# Altium PCB ESCV3.PcbDoc
Units mm, origin at the board's own origin, x right, y up, seen from the top; angles counter-clockwise.
Board outline 58 x 34.5 mm, 2 copper layers (Top Layer, Bottom Layer); 54 components, 55 nets, 183 pads, 95 vias.
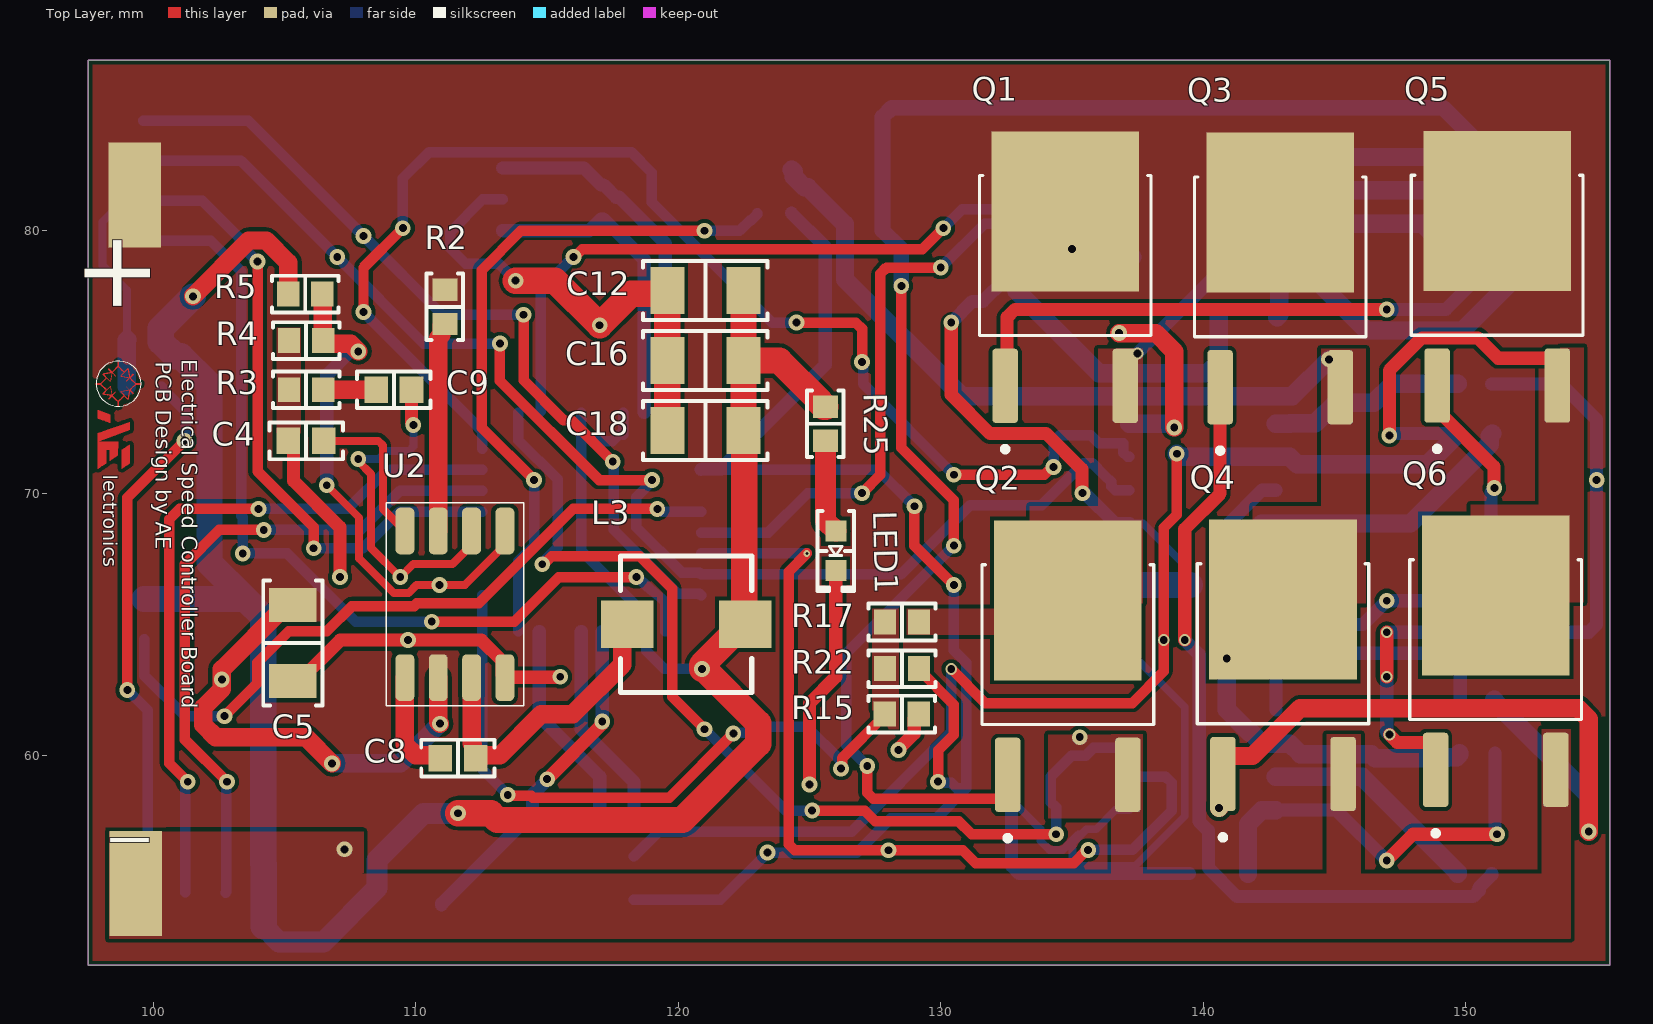
[diagram p0: Top Layer view]
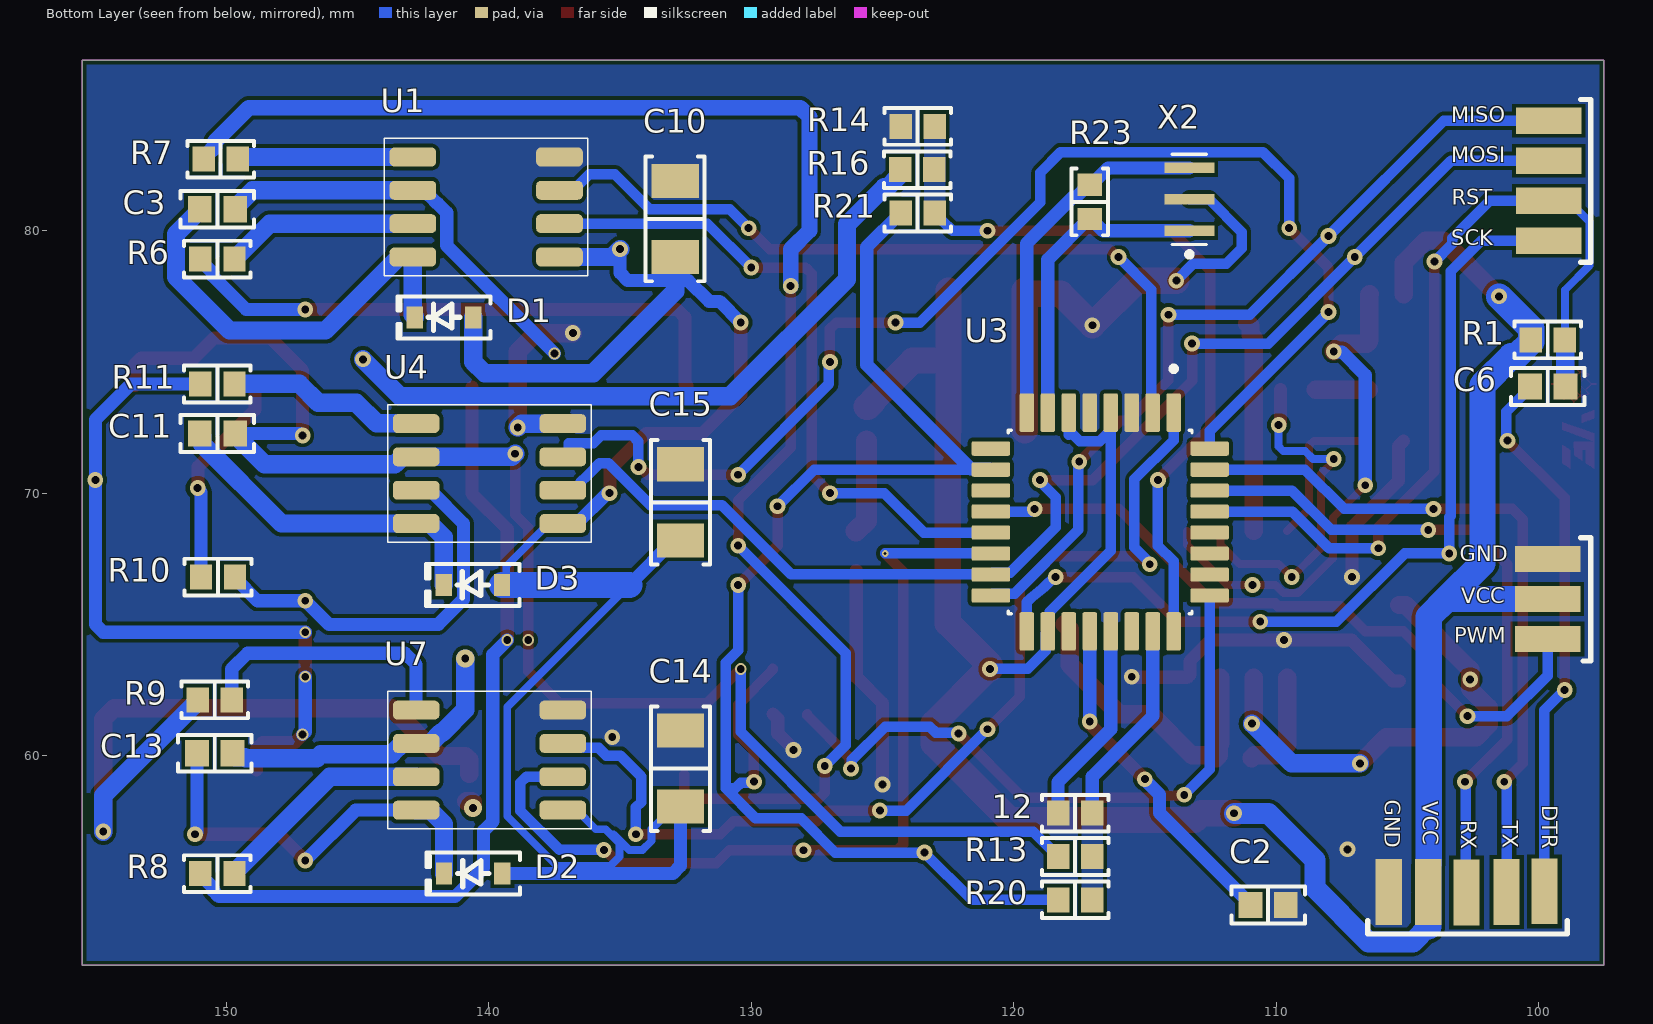
[diagram p1: Bottom Layer view, seen from below]
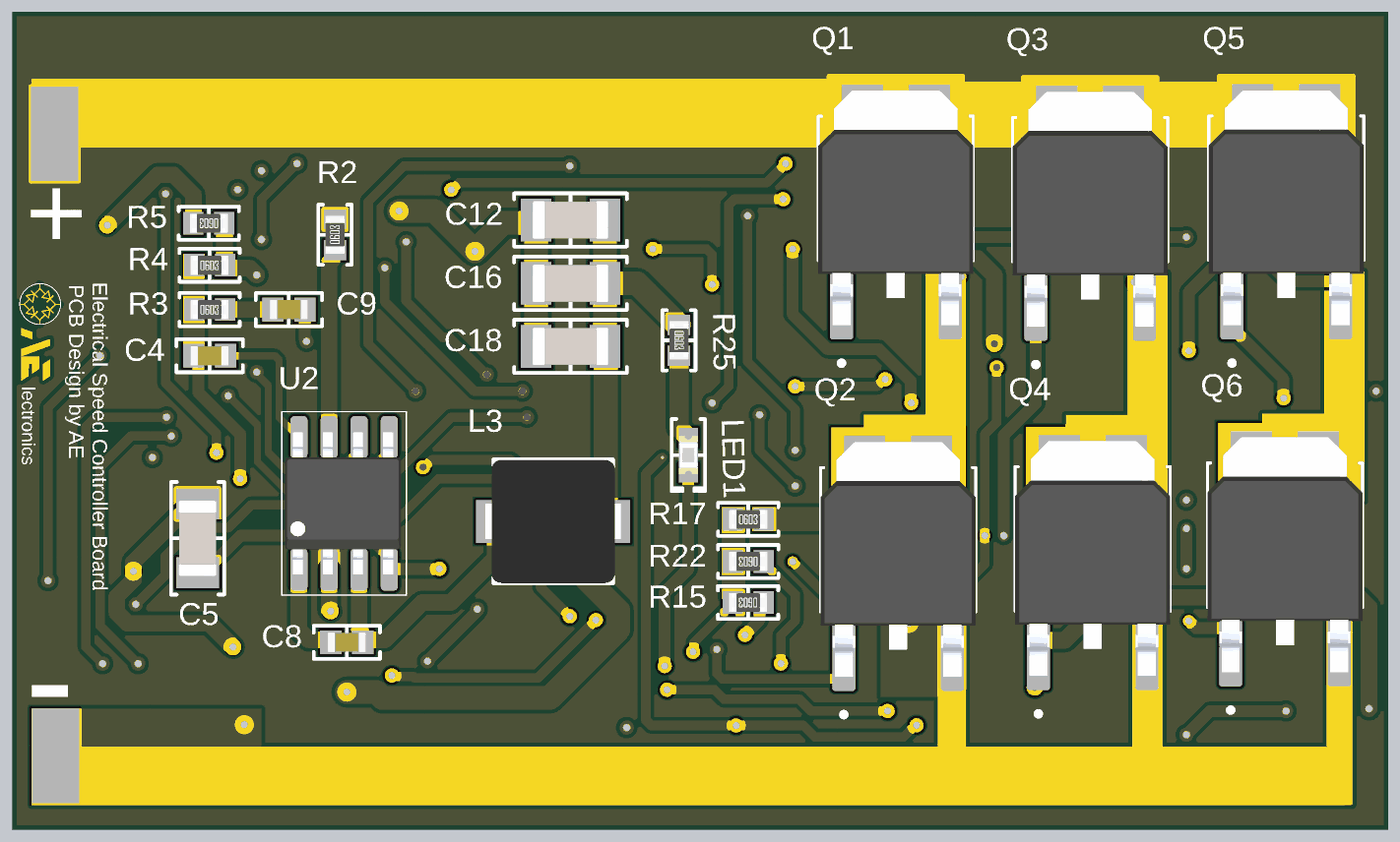
[diagram p2: 3D render of the assembled board from above, using the file's embedded part models]
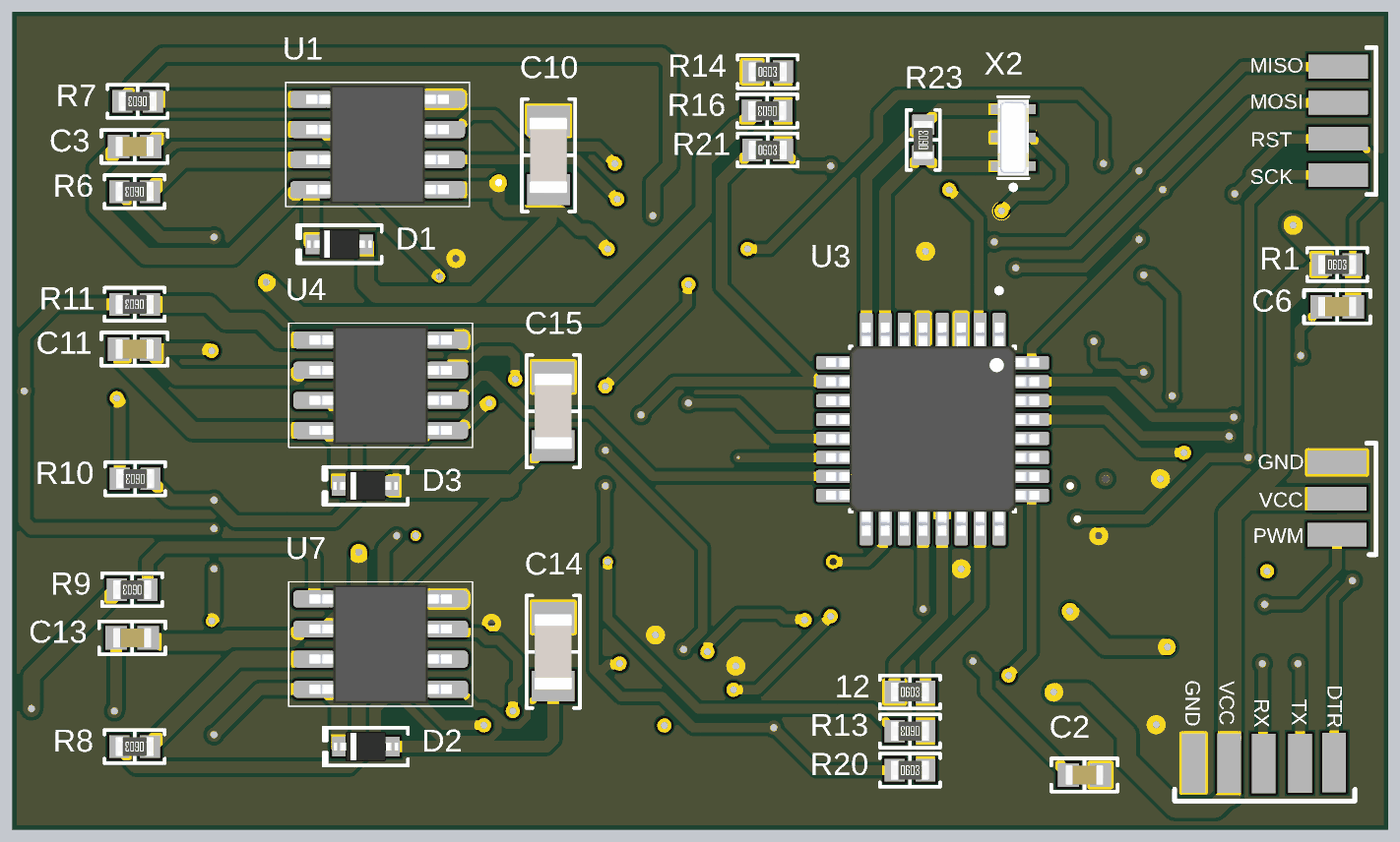
[diagram p3: 3D render of the assembled board from below, using the file's embedded part models]

## Layer stack, top to bottom
Top Solder: solder mask 0.0102, Solder Resist, Dk 3.5
Top Layer: signal copper 0.0356
Dielectric 1: dielectric 0.32, FR-4, Dk 4.8
Bottom Layer: signal copper 0.0356
Bottom Solder: solder mask 0.0102, Solder Resist, Dk 3.5

## Board outline
97.5,52 97.5,86.5 155.5,86.5 155.5,52

## Design rules (kind name [scope] priority, off if disabled: settings)
Clearance [All] p1: gap=0.152 ignorepadtopadclearanceinfootprint=FALSE
HoleSize [All] p1: absolutevalues=TRUE maxlimit=1 minlimit=0.025 maxpercent=80.000 minpercent=20.000
PolygonConnect [All] p1: connectstyle=Direct reliefconductorwidth=0.254 reliefentries=4 polygonreliefangle="90 Angle" airgapwidth=0.254
RoutingVias [All] p1: holewidth=0.711 width=1.27 viastyle="Through Hole" minholewidth=0.711 minwidth=1.27 maxholewidth=0.711 maxwidth=1.27
SolderMaskExpansion [All] p1: expansion=0.102 istentingtop=FALSE
Width [All] p1: maxlimit=2 minlimit=0.152 preferedwidth=0.5
29 further rules are at their usual default settings.

## Components (designator, comment, footprint, x,y, rotation, side; value= is the part's Value field where it differs from the comment)
12 "10 kOhms" "RES 0603_1608" 117.654,57.803 r180 bottom
C2 "100 nF" "CAP 0603_1608" 110.3,54.3 r180 bottom
C3 "2.2 uF" "CAP 0603_1608" 150.35,80.824 r180 bottom
C4 "100 nF" "CAP 0603_1608" 105.813,71.993 r0 top
C5 "10 µF" "CAP 1206_3216 - 0.8MM" 105.305,64.289 r90 top
C6 "100 nF" "CAP 0603_1608" 99.643,74.063 r0 bottom
C8 "10 nF" "CAP 0603_1608" 111.6,59.9 r0 top value="10 nF"
C9 "3.9 nF" "CAP 0603_1608" 109.156,73.941 r0 top
C10 "10 µF" "CAP 1206_3216 - 0.8MM" 132.9,80.452 r270 bottom
C11 "2.2 uF" "CAP 0603_1608" 150.35,72.274 r180 bottom
C12 "22 µF" "CAP 1206_3216 - 0.8MM" 121.031,77.724 r0 top
C13 "2.2 uF" "CAP 0603_1608" 150.45,60.089 r180 bottom
C14 "10 µF" "CAP 1206_3216 - 0.8MM" 132.7,59.5 r270 bottom
C15 "10 µF" "CAP 1206_3216 - 0.8MM" 132.7,69.65 r270 bottom
C16 "22 µF" "CAP 1206_3216 - 0.8MM" 121.031,75.051 r0 top
C18 "22 µF" "CAP 1206_3216 - 0.8MM" 121.031,72.39 r0 top
D1 "1N4148WS-7-F" SOD323 141.713,76.7 r0 bottom
D2 "1N4148WS-7-F" SOD323 140.6,55.5 r0 bottom
D3 "1N4148WS-7-F" SOD323 140.613,66.5 r0 bottom
L3 "10 µH" "BOURNS SRP5030T" 120.3,65 r180 top
LED1 "Green" "LED 0603_1608 GREEN" 126,67.8 r270 top
Q1 "IRLR7843TRPBF" TO229P990X239-3_4N 134.747,78.232 r90 top
Q2 "IRLR7843TRPBF" TO229P990X239-3_4N 134.844,63.404 r90 top
Q3 "IRLR7843TRPBF" TO229P990X239-3_4N 142.94,78.178 r90 top
Q4 "IRLR7843TRPBF" TO229P990X239-3_4N 143.046,63.436 r90 top
Q5 "IRLR7843TRPBF" TO229P990X239-3_4N 151.21,78.24 r90 top
Q6 "IRLR7843TRPBF" TO229P990X239-3_4N 151.153,63.594 r90 top
R1 "10 kOhms" "RES 0603_1608" 99.643,75.841 r180 bottom
R2 "100 kOhms" "RES 0603_1608" 111.1,77.1 r90 top
R3 "6.81 kOhms" "RES 0603_1608" 105.813,73.941 r0 top
R4 "10 kOhms" "RES 0603_1608" 105.813,75.813 r0 top
R5 "44.2 kOhms" "RES 0603_1608" 105.779,77.586 r180 top
R6 "100 Ohms" "RES 0603_1608" 150.35,78.919 r0 bottom
R7 "100 Ohms" "RES 0603_1608" 150.223,82.729 r0 bottom
R8 "100 Ohms" "RES 0603_1608" 150.35,55.5 r0 bottom
R9 "100 Ohms" "RES 0603_1608" 150.45,62.121 r0 bottom
R10 "100 Ohms" "RES 0603_1608" 150.325,66.8 r0 bottom
R11 "100 Ohms" "RES 0603_1608" 150.35,74.163 r0 bottom
R13 "33 kOhms" "RES 0603_1608" 117.654,56.152 r0 bottom
R14 "10 kOhms" "RES 0603_1608" 123.658,83.979 r180 bottom
R15 "10 kOhms" "RES 0603_1608" 128.518,61.578 r180 top
R16 "33 kOhms" "RES 0603_1608" 123.673,82.328 r0 bottom
R17 "33 kOhms" "RES 0603_1608" 128.524,65.089 r0 top
R20 "33 kOhms" "RES 0603_1608" 117.654,54.501 r180 bottom
R21 "33 kOhms" "RES 0603_1608" 123.658,80.677 r180 bottom
R22 "33 kOhms" "RES 0603_1608" 128.524,63.311 r180 top
R23 "10 kOhms" "RES 0603_1608" 117.1,81.1 r90 bottom
R25 "100 Ohms" "RES 0603_1608" 125.603,72.644 r270 top
U1 "IR2101STRPBF" IR2101STRPBF 140.105,81.034 r0 bottom
U2 "MP2307DN-LF-Z" MP2307DN-LF-Z 112.036,65.813 r90 top
U3 "ATMEGA328P-AU" QFP80P900X900X120-32N 116.7,68.9 r270 bottom
U4 "IR2101STRPBF" IR2101STRPBF 139.978,70.874 r0 bottom
U7 "IR2101STRPBF" IR2101STRPBF 139.978,59.952 r0 bottom
X2 "CSTCE16M0V53Z-R0" OSC_CSTCE16M0V53Z-R0 113.3,81.2 r90 bottom

## Footprints (in the part's own frame and the unit in brackets; to place one, negate y for a bottom-side part, rotate by r counter-clockwise, add the part's x,y. Pads: shape width x height; smd on the part's side, far side on the other; paste and mask are expansions set on the pad)
"BOURNS SRP5030T" [mm] "Precision Wire Wound Inductor, 2-Leads, Body 5.70x5.20mm, IPC Medium Density"
  rect 2x1.8 smd: 1(-2.25,0) 2(2.25,0)
  silkscreen extent -2.5,-2.6 2.5,2.6, body extent -2.85,-2.6 2.85,2.6, height 3
"CAP 0603_1608" [mm] "Chip Capacitor, 2-Leads, Body 1.60x0.80mm, IPC Medium Density"
  rect 0.9x1 smd: 1(-0.675,0) 2(0.675,0)
  silkscreen extent -1.4,-0.7 1.4,0.7, body extent -0.8,-0.41 0.8,0.41, height 0.82
"CAP 1206_3216 - 0.8MM" [mm] "Chip Capacitor, 2-Leads, Body 3.25x1.60mm, IPC Medium Density"
  rect 1.3x1.8 smd: 1(-1.45,0) 2(1.45,0)
  silkscreen extent -2.37,-1.13 2.37,1.13, body extent -1.6,-0.8 1.6,0.8, height 0.8
IR2101STRPBF [mm]
  rrect50% 1.78x0.72 smd: 1(-2.794,2.032) 2(-2.794,0.762) 3(-2.794,-0.508) 4(-2.794,-1.778) 5(2.794,-1.778) 6(2.794,-0.508) 7(2.794,0.762) 8(2.794,2.032)
  silkscreen extent -3.88,-2.5 3.87,2.75, body extent -3,-2.37 3,2.63, height 1.75
"LED 0603_1608 GREEN" [mm] "Chip Diode, 2-Leads, Body 1.60x0.80mm, IPC Medium Density"
  rect 0.8x0.8 smd: 1(-0.75,0) 2(0.75,0)
  silkscreen extent -1.52,-0.7 1.52,0.7, body extent -0.8,-0.4 0.8,0.4, height 0.53
MP2307DN-LF-Z [mm]
  rrect50% 1.78x0.72 smd: 1(-2.844,2.457) 2(-2.844,1.187) 3(-2.844,-0.083) 4(-2.844,-1.353) 5(2.744,-1.353) 6(2.744,-0.083) 7(2.744,1.187) 8(2.744,2.457)
  silkscreen extent -3.92,-2.08 3.83,3.18, body extent -3.05,-1.85 2.95,3.05, height 1.7
OSC_CSTCE16M0V53Z-R0 [mm]
  rect 0.4x1.9 smd: 1(-1.2,0) 2(0,0) 3(1.2,0)
  silkscreen extent -2.2,-0.65 1.72,0.65, body extent -1.6,-0.65 1.6,0.65, height 1
QFP80P900X900X120-32N [mm]
  rrect25% 1.47x0.55 smd: 1(-4.17,2.8) 2(-4.17,2) 3(-4.17,1.2) 4(-4.17,0.4) 5(-4.17,-0.4) 6(-4.17,-1.2) 7(-4.17,-2) 8(-4.17,-2.8) 17(4.17,-2.8) 18(4.17,-2) 19(4.17,-1.2) 20(4.17,-0.4) 21(4.17,0.4) 22(4.17,1.2) 23(4.17,2) 24(4.17,2.8)
  rrect25% 0.55x1.47 smd: 9(-2.8,-4.17) 10(-2,-4.17) 11(-1.2,-4.17) 12(-0.4,-4.17) 13(0.4,-4.17) 14(1.2,-4.17) 15(2,-4.17) 16(2.8,-4.17) 25(2.8,4.17) 26(2,4.17) 27(1.2,4.17) 28(0.4,4.17) 29(-0.4,4.17) 30(-1.2,4.17) 31(-2,4.17) 32(-2.8,4.17)
  silkscreen extent -5.94,-3.5 3.5,3.5, body extent -4.5,-4.5 4.5,4.5, height 1.2
"RES 0603_1608" [mm] "Chip Resistor, 2-Leads, Body 1.60x0.80mm, IPC Medium Density"
  rect 0.85x0.95 smd: 1(-0.65,0) 2(0.65,0)
  silkscreen extent -1.27,-0.7 1.27,0.7, body extent -0.8,-0.4 0.8,0.4, height 0.45
SOD323 [mm] "SOD, 2-Leads, Body 1.25x2.50mm, IPC Medium Density"
  rect 0.625x0.83 smd: 1(-1.113,0) 2(1.112,0)
  silkscreen extent -1.78,-0.8 1.78,0.8, body extent -1.36,-0.63 1.36,0.62, height 1.05
TO229P990X239-3_4N [mm]
  rrect25% 2.83x0.97 smd: 1(-4.14,2.29) 3(-4.14,-2.29)
  rect 6.1x5.63 smd paste-4: 4(2.51,0)
  silkscreen extent -6.65,-3.27 3.87,3.27, body extent -4.95,-3.27 4.95,3.27, height 2.39

## Part data
12 R1 R4 R14 R15 R23: library part RNCS0603BKE10K0, "RES 10K OHM 0.1% 1/16W 0603", Device Package="0603 (1608 Metric)", manufacturer="Stackpole Electronics Inc", Operating Temperature="-55°C ~ 155°C", Power (Watts)="0.063W, 1/16W", Ratings=AEC-Q200, Supplier Device Package=0603, Supplier Part Number 1=RNCS0603BKE10K0CT-ND, Temperature Coefficient=±25ppm/°C, Tolerance=±0.1%, componentlink1description=Datasheet, componentlink1url=https://www.seielect.com/catalog/sei-rncs_rnch.pdf, componentlink2description="DigiKey Link", componentlink2url=https://www.digikey.com/en/products/detail/stackpole-electronics-inc/RNCS0603BKE10K0/1708836, Composition="Thin Film", Features="Anti-Corrosive, Automotive AEC-Q200, Moisture Resistant", Height - Seated (Max)="0.022\" (0.55mm)", lastupdated="9.02.2024 20:43:37", Lifecycle Status=Active, Minimum Order=1, Number of Terminations=2, Package / Case="0603 (1608 Metric)", packaging=TapeAndReel, Part Number=RNCS0603BKE10K0, Part Status=Active, partid=4838, Price=0.06, Resistance="10 kOhms", series=RNCS, Size / Dimension="0.061\" L x 0.031\" W (1.55mm x 0.80mm)", Supplier 1=DigiKey
C2 C3 C4 C6 C8 C9 C11 C13: library part CBR06C399BAGAC, "CAP CER 3.9PF 250V C0G/NP0 0603", Capacitance="3.9 pF", Device Package="0603 (1608 Metric)", manufacturer=KEMET, Operating Temperature="-55°C ~ 125°C", Supplier Part Number 1=399-8807-1-ND, Temperature Coefficient="C0G, NP0", Tolerance=±0.1pF, Voltage - Rated=250V, Applications="RF, Microwave, High Frequency", componentlink1description=Datasheet, componentlink1url=https://api.kemet.com/component-edge/download/datasheet/CBR06C399BAGAC.pdf, componentlink2description="DigiKey Link", componentlink2url=https://www.digikey.com/en/products/detail/kemet/CBR06C399BAGAC/3479707, Features="High Q, Low Loss, Ultra Low ESR", lastupdated="9.02.2024 20:10:06", Lifecycle Status=Active, Minimum Order=1, Mounting Type="Surface Mount, MLCC", Package / Case="0603 (1608 Metric)", packaging=TapeAndReel, Part Number=CBR06C399BAGAC, Part Status=Active, partid=18061, Price=0.12, series="CBR-SMD RF C0G", Size / Dimension="0.063\" L x 0.031\" W (1.60mm x 0.80mm)", Supplier 1=DigiKey, Thickness (Max)="0.035\" (0.90mm)"
C5 C10 C14 C15: library part EMK316BJ106MD-T, "CAP CER 10UF 16V X5R 1206", Device Package="1206 (3216 Metric)", manufacturer="Taiyo Yuden", Operating Temperature="-55°C ~ 85°C", Supplier Part Number 1=587-4881-1-ND, Temperature Coefficient=X5R, Tolerance=±20%, Voltage - Rated=16V, Applications="SMPS Filtering", Capacitance="10 µF", componentlink1description=Datasheet, componentlink1url=http://www.yuden.co.jp/productdata/catalog/mlcc06_e.pdf, componentlink2description="DigiKey Link", componentlink2url=https://www.digikey.com/en/products/detail/taiyo-yuden/EMK316BJ106MD-T/6563474, lastupdated="4.06.2024 19:10:41", Lifecycle Status=Active, Minimum Order=1, Mounting Type="Surface Mount, MLCC", Package / Case="1206 (3216 Metric)", packaging=TapeAndReel, Part Number=EMK316BJ106MD-T, Part Status=Active, partid=18996, Price=0.04, series=M, Size / Dimension="0.126\" L x 0.063\" W (3.20mm x 1.60mm)", Supplier 1=DigiKey, Thickness (Max)="0.037\" (0.95mm)"
C12 C16 C18: library part CL31A226MOCLNNC, "CAP CER 22UF 16V X5R 1206", Device Package="1206 (3216 Metric)", manufacturer="Samsung Electro-Mechanics", Operating Temperature="-55°C ~ 85°C", Supplier Part Number 1=1276-2728-1-ND, Temperature Coefficient=X5R, Tolerance=±20%, Voltage - Rated=16V, Applications="General Purpose", Capacitance="22 µF", componentlink1description=Datasheet, componentlink1url=http://www.samsungsem.com/kr/support/product-search/mlcc/CL31A226MOCLNNC.jsp, componentlink2description="DigiKey Link", componentlink2url=https://www.digikey.com/en/products/detail/samsung-electro-mechanics/CL31A226MOCLNNC/3888386, Features="Low Profile", lastupdated="4.06.2024 19:10:40", Lifecycle Status=Active, Minimum Order=1, Mounting Type="Surface Mount, MLCC", Package / Case="1206 (3216 Metric)", packaging=TapeAndReel, Part Number=CL31A226MOCLNNC, Part Status=Active, partid=19106, Price=0.04, series=CL, Size / Dimension="0.126\" L x 0.063\" W (3.20mm x 1.60mm)", Supplier 1=DigiKey, Thickness (Max)="0.037\" (0.95mm)"
D1 D2 D3: "DIODE GEN PURP 75V 150MA SOD323", Capacitance @ Vr, F="2pF @ 0V, 1MHz", Current - Average Rectified (Io)=150mA, Current - Reverse Leakage @ Vr="1 µA @ 75 V", manufacturer="Diodes Incorporated", Operating Temperature - Junction="-65°C ~ 150°C", Package / Case="SC-76, SOD-323", Supplier Device Package=SOD-323, Supplier Part Number 1=1N4148WS-FDICT-ND, Voltage - DC Reverse (Vr) (Max)="75 V", Voltage - Forward (Vf) (Max) @ If="1.25 V @ 150 mA", componentlink1description=Datasheet, componentlink1url=https://www.diodes.com/assets/Datasheets/ds30097.pdf, componentlink2description="DigiKey Link", componentlink2url=https://www.digikey.com/en/products/detail/diodes-incorporated/1N4148WS-7-F/815127, Diode Type=Standard, lastupdated="3.06.2024 20:20:13", Lifecycle Status=Active, Minimum Order=1, Mounting Type="Surface Mount", packaging=TapeAndReel, Part Number=1N4148WS-7-F, Part Status=Active, partid=3076, Price=0.02, Reverse Recovery Time (trr)="4 ns", series=-, Speed="Small Signal =< 200mA (Io), Any Speed", Supplier 1=DigiKey
L3: library part SRP5030T-100M, "FIXED IND 10UH 2.75A 128MOHM SMD", Current - Saturation=3.5A, Current Rating (Amps)="2.75 A", DC Resistance (DCR)="128mOhm Max", Device Package=Nonstandard, manufacturer="Bourns Inc.", Operating Temperature="-40°C ~ 125°C", Supplier Part Number 1=SRP5030T-100MCT-ND, Tolerance=±20%, Inductance Frequency - Test="100 kHz", componentlink1description=Datasheet, componentlink1url=https://www.bourns.com/docs/Product-Datasheets/SRP5030T.pdf, componentlink2description="DigiKey Link", componentlink2url=https://www.digikey.com/en/products/detail/bourns-inc/SRP5030T-100M/3986087, Height - Seated (Max)="0.118\" (3.00mm)", lastupdated="3.06.2024 20:02:35", Lifecycle Status=Active, Material - Core="Iron Powder", Minimum Order=1, Mounting Type="Surface Mount", Package / Case=Nonstandard, packaging=TapeAndReel, Part Number=SRP5030T-100M, Part Status=Active, partid=9, Price=0.59, series=SRP5030T, Shielding=Shielded, Size / Dimension="0.224\" L x 0.205\" W (5.70mm x 5.20mm)", Supplier 1=DigiKey, Type="Drum Core, Wirewound", Inductance="10 µH"
LED1: library part LSM0603453V, "LED GREEN CLEAR CHIP 0603 SMD", Current - Test=20mA, Device Package="0603 (1608 Metric)", Lens Color=Colorless, manufacturer="Visual Communications Company - VCC", Millicandela Rating=63mcd, Supplier Device Package="Chip LED", Supplier Part Number 1=LSM0603453VCT-ND, Voltage - Forward (Vf) (Typ)=2V, Color=Green, componentlink1description=Datasheet, componentlink1url=https://vcclite.com/wp-content/uploads/wpallimport/files/files/LSM0603453V.pdf, componentlink2description="DigiKey Link", componentlink2url=https://www.digikey.com/en/products/detail/visual-communications-company-vcc/LSM0603453V/9486724, Configuration=Standard, Height (Max)=0.65mm, lastupdated="3.06.2024 19:58:54", Lens Size="1.20mm x 0.80mm", Lens Style="Rectangle with Flat Top", Lens Transparency=Clear, Lifecycle Status=Active, Minimum Order=1, Mounting Type="Surface Mount", Package / Case="0603 (1608 Metric)", packaging=TapeAndReel, Part Number=LSM0603453V, Part Status=Active, partid=579, Price=0.09, series=LSM0603, Size / Dimension="1.60mm L x 0.80mm W", Supplier 1=DigiKey, Viewing Angle=120°, Wavelength - Dominant=572nm, Wavelength - Peak=571nm
Q1 Q2 Q3 Q4 Q5 Q6: "RoHS Compliant", Package="TO-252-3 Infineon", Availability="In Stock", Check_prices=https://www.snapeda.com/parts/IRLR7843TRPBF/Infineon+Technologies/view-part/?ref=eda, MF="Infineon Technologies", MP=IRLR7843TRPBF, Price=None, Purchase-URL=https://pricing.snapeda.com/search/part/IRLR7843TRPBF/?ref=eda, SnapEDA_Link=https://www.snapeda.com/parts/IRLR7843TRPBF/Infineon+Technologies/view-part/?ref=snap
R2: library part RNCS0603BKE100K, "RES 100K OHM 0.1% 1/16W 0603", Device Package="0603 (1608 Metric)", manufacturer="Stackpole Electronics Inc", Operating Temperature="-55°C ~ 155°C", Power (Watts)="0.063W, 1/16W", Ratings=AEC-Q200, Supplier Device Package=0603, Supplier Part Number 1=RNCS0603BKE100KCT-ND, Temperature Coefficient=±25ppm/°C, Tolerance=±0.1%, componentlink1description=Datasheet, componentlink1url=https://www.seielect.com/catalog/sei-rncs_rnch.pdf, componentlink2description="DigiKey Link", componentlink2url=https://www.digikey.com/en/products/detail/stackpole-electronics-inc/RNCS0603BKE100K/1708835, Composition="Thin Film", Features="Anti-Corrosive, Automotive AEC-Q200, Moisture Resistant", Height - Seated (Max)="0.022\" (0.55mm)", lastupdated="9.02.2024 20:43:37", Lifecycle Status=Active, Minimum Order=1, Number of Terminations=2, Package / Case="0603 (1608 Metric)", packaging=TapeAndReel, Part Number=RNCS0603BKE100K, Part Status=Active, partid=4849, Price=0.06, Resistance="100 kOhms", series=RNCS, Size / Dimension="0.061\" L x 0.031\" W (1.55mm x 0.80mm)", Supplier 1=DigiKey
R3: library part RQ73C1J6K81BTDF, "RQ 0603 6K81 0.1% 10PPM 1K RL", Device Package="0603 (1608 Metric)", manufacturer="TE Connectivity Passive Product", Operating Temperature="-55°C ~ 155°C", Power (Watts)=0.15W, Ratings=AEC-Q200, Supplier Device Package=0603, Supplier Part Number 1=1712-RQ73C1J6K81BTDFCT-ND, Temperature Coefficient=±10ppm/°C, Tolerance=±0.1%, componentlink1description=Datasheet, componentlink1url=https://www.te.com/commerce/DocumentDelivery/DDEController?Action=srchrtrv&DocNm=1773270-2&DocType=DS&DocLang=English, componentlink2description="DigiKey Link", componentlink2url=https://www.digikey.com/en/products/detail/te-connectivity-passive-product/RQ73C1J6K81BTDF/13965021, Composition="Thin Film", Features="Anti-Sulfur, Automotive AEC-Q200, Moisture Resistant", Height - Seated (Max)="0.022\" (0.55mm)", lastupdated="9.02.2024 20:41:31", Lifecycle Status=Active, Minimum Order=1, Number of Terminations=2, Package / Case="0603 (1608 Metric)", packaging=TapeAndReel, Part Number=RQ73C1J6K81BTDF, Part Status=Active, partid=63038, Price=0.38, Resistance="6.81 kOhms", series=RQ73, Size / Dimension="0.061\" L x 0.031\" W (1.55mm x 0.80mm)", Supplier 1=DigiKey
R5: library part ERJ-PB3B4422V, "RES SMD 44.2K OHM 0.1% 1/5W 0603", Device Package="0603 (1608 Metric)", manufacturer="Panasonic Electronic Components", Operating Temperature="-55°C ~ 155°C", Power (Watts)="0.2W, 1/5W", Ratings=AEC-Q200, Supplier Device Package=0603, Supplier Part Number 1=P20159CT-ND, Temperature Coefficient=±50ppm/°C, Tolerance=±0.1%, componentlink1description=Datasheet, componentlink1url=https://industrial.panasonic.com/cdbs/www-data/pdf/RDM0000/AOA0000C328.pdf, componentlink2description="DigiKey Link", componentlink2url=https://www.digikey.com/en/products/detail/panasonic-electronic-components/ERJ-PB3B4422V/6212942, Composition="Thick Film", Features="Automotive AEC-Q200, Pulse Withstanding", Height - Seated (Max)="0.022\" (0.55mm)", lastupdated="9.02.2024 20:43:36", Lifecycle Status=Active, Minimum Order=1, Number of Terminations=2, Package / Case="0603 (1608 Metric)", packaging=TapeAndReel, Part Number=ERJ-PB3B4422V, Part Status=Active, partid=4939, Price=0.02, Resistance="44.2 kOhms", series=ERJ-PB3, Size / Dimension="0.063\" L x 0.031\" W (1.60mm x 0.80mm)", Supplier 1=DigiKey
R6 R7 R8 R9 R10 R11 R25: library part RNCS0603BKE100R, "RES 100 OHM 0.1% 1/16W 0603", Device Package="0603 (1608 Metric)", manufacturer="Stackpole Electronics Inc", Operating Temperature="-55°C ~ 155°C", Power (Watts)="0.063W, 1/16W", Ratings=AEC-Q200, Supplier Device Package=0603, Supplier Part Number 1=RNCS0603BKE100RCT-ND, Temperature Coefficient=±25ppm/°C, Tolerance=±0.1%, componentlink1description=Datasheet, componentlink1url=https://www.seielect.com/catalog/sei-rncs_rnch.pdf, componentlink2description="DigiKey Link", componentlink2url=https://www.digikey.com/en/products/detail/stackpole-electronics-inc/RNCS0603BKE100R/1799988, Composition="Thin Film", Features="Anti-Corrosive, Automotive AEC-Q200, Moisture Resistant", Height - Seated (Max)="0.022\" (0.55mm)", lastupdated="9.02.2024 20:43:37", Lifecycle Status=Active, Minimum Order=1, Number of Terminations=2, Package / Case="0603 (1608 Metric)", packaging=TapeAndReel, Part Number=RNCS0603BKE100R, Part Status=Active, partid=4839, Price=0.06, Resistance="100 Ohms", series=RNCS, Size / Dimension="0.061\" L x 0.031\" W (1.55mm x 0.80mm)", Supplier 1=DigiKey
R13 R16 R17 R20 R21 R22: library part CPF0603B33KE1, "RES SMD 33K OHM 0.1% 1/16W 0603", Device Package="0603 (1608 Metric)", manufacturer="TE Connectivity Passive Product", Operating Temperature="-55°C ~ 155°C", Power (Watts)="0.063W, 1/16W", Supplier Device Package=0603, Supplier Part Number 1=A103086CT-ND, Temperature Coefficient=±25ppm/°C, Tolerance=±0.1%, componentlink1description=Datasheet, componentlink1url=https://www.te.com/commerce/DocumentDelivery/DDEController?Action=srchrtrv&DocNm=1773200&DocType=DS&DocLang=English, componentlink2description="DigiKey Link", componentlink2url=https://www.digikey.com/en/products/detail/te-connectivity-passive-product/CPF0603B33KE1/2381952, Composition="Thin Film", Height - Seated (Max)="0.022\" (0.55mm)", lastupdated="9.02.2024 20:43:33", Lifecycle Status=Active, Minimum Order=1, Number of Terminations=2, Package / Case="0603 (1608 Metric)", packaging=TapeAndReel, Part Number=CPF0603B33KE1, Part Status=Active, partid=5785, Price=0.12, Resistance="33 kOhms", series="CPF, Neohm", Size / Dimension="0.061\" L x 0.031\" W (1.55mm x 0.80mm)", Supplier 1=DigiKey
U3: "AVR AVRÂ® ATmega Microcontroller IC 8-Bit 20MHz 32KB (16K x 16) FLASH 32-TQFP (7x7)", Package="TQFP-32 Microchip", Check_prices=https://www.snapeda.com/parts/ATMEGA328P-AU/Microchip/view-part/?ref=eda, MF="Microchip Technology", MP=ATMEGA328P-AU, SnapEDA_Link=https://www.snapeda.com/parts/ATMEGA328P-AU/Microchip/view-part/?ref=snap
X2: "20MHz Ceramic Resonator Built in Capacitor 15pF +/- 0.2% -40C - 125C Surface Mount", Package=None, Availability=Unavailable, MF=Murata, MP=CSTCE16M0V53Z-R0, Price=None

## Free pads (board coordinates)
  rect 2x4 smd: 1(99.28,81.361) 2(99.314,55.118)
  rect 2.5x1 smd far side: 1(99.605,84.193) 1(99.651,67.488) 2(99.605,82.669) 2(99.651,65.964) 3(99.605,81.145) 3(99.651,64.44) 4(99.605,79.621)
  rect 1x2.5 smd far side: 1(105.7,54.8) 2(104.2,54.8) 3(102.743,54.779) 4(101.211,54.798) 5(99.77,54.825)

## Via types
v1: diameter 0.6, hole 0.3, Top Layer to Bottom Layer, tented both sides, 43 vias
v2: diameter 0.6, hole 0.3, Top Layer to Bottom Layer, 42 vias
v3: diameter 0.45, hole 0.3, Top Layer to Bottom Layer, 4 vias
v4: diameter 0.45, hole 0.3, Top Layer to Bottom Layer, tented both sides, 3 vias
v5: diameter 0.7, hole 0.3, Top Layer to Bottom Layer, 2 vias
v6: diameter 0.254, hole 0.124, Top Layer to Bottom Layer, tented both sides, 1 vias

## Nets (pads, with @x,y where several pads share a name; then routed paths per layer and width w, separated by ;. In a path a pad name is that pad's centre, name@x,y a point inside that pad or via, vN(x,y) a via of type N, cw(c..) or ccw(c..) an arc to the next point about the centre after c; other vN are vias at no path point)
+12: C5.2 C10.2 C14.2 C15.2 D1.1 D2.1 D3.1 pad.1@99.28,81.361 Q1.4 Q3.4 Q5.4 R2.2 U1.1 U2.2 U4.1 U7.1 | length 94.3
  Top Layer w0.5: v2(130.4,76.5) 130.4,73.752 131.877,72.275 134.018,72.275 135.381,70.912 135.381,70.019 v2(135.4,70)
  Top Layer w0.7: C5.2 105.055,65.739 102.6,63.284 v2(102.6,62.9) 102.6,62.534 101.898,61.832 101.898,61.168 102.368,60.698 105.802,60.698 v2(106.8,59.7) ; U2.2 110.849,61.282 v2(110.916,61.216)
  Bottom Layer w0.3: C14.2 132.95,58.05 133.798,57.202 133.798,56.751 134.151,56.398 134.649,56.398 135.247,56.995 ; 134.65,66.5 139.302,61.848 139.302,57.686 137.414,55.798 135.369,55.798 135.017,56.151 135.017,56.649 135.556,57.189 135.923,57.189 136.654,57.92 U7.1 ; U4.1 137.714,68.842 139.338,67.218 139.338,66.663 D3.1
  Bottom Layer w0.5: v2(130.4,76.5) 131.21,77.31 131.61,77.31 132.4,78.1 132.9,78.1 134.707,78.1 135,78.393 v2(135,79.3) ; C14.2 132.7,55.793 132.993,55.5 D2.1 ; C15.2@132.95,68.2 134.65,66.5 ; v2(135.4,70) 135.419,69.981 135.515,69.981 136.654,68.842 U4.1
  Bottom Layer w0.7: v2(106.8,59.7) 109.4,59.7 v2(110.916,61.216) ; C10.2 132.9,78.1 132.9,77.7 136.025,74.575 140.165,74.575 140.6,75.01 D1.1 ; v2(135,79.3) 135.298,79.002 U1.1
  Bottom Layer w1: C15.2 C15.2@132.95,68.2 ; 134.65,66.5 D3.1
A0: 12.2 R13.1 R20.2 U3.23 | length 7.9
  Bottom Layer w0.5: U3.23 114.7,61.5 117.004,59.196 12.2
A1: R14.2 R16.1 R21.2 U3.24 | length 26.3
  Top Layer w0.4: v1(114.5,70.5) 112.5,72.5 112.5,78.5 114,80 v1(121,80)
  Bottom Layer w0.4: U3.24 113.9,67.4 114.5,68 v1(114.5,70.5) ; v1(121,80) 122.331,80 122.733,80.402 122.783,80.402 123.008,80.627 R21.2
A2: R15.2 R17.1 R22.2 U3.25 | length 25.5
  Top Layer w0.4: v2(113.5,58.5) 113.538,58.462 114.392,58.462 114.456,58.398 119.657,58.398 v2(122.097,60.839) ; v2(126.2,59.5) 126.238,59.538 126.238,59.898 127.868,61.528 R15.2
  Bottom Layer w0.4: U3.25 112.53,59.47 v2(113.5,58.5) ; v2(122.097,60.839) 122.136,60.877 122.974,60.877 123.197,61.1 124.9,61.1 126.162,59.838 126.162,59.538 v2(126.2,59.5)
A3: U3.26
A4: U3.27
A5: U3.28
A6: U3.19
A7: U3.22
AH: U1.2 U3.13 | length 25.8
  Top Layer w0.4: v1(127,70) 127.7,70.7 127.7,78.366 127.934,78.6 v2(130,78.6)
  Bottom Layer w0.4: U3.13 123.425,68.5 124.925,70 v1(127,70) ; v2@130,78.614 v2(130,78.6) 131.672,80.272 U1.2
AL: U1.3 U3.2 | length 29.3
  Top Layer w0.4: v2(116,79) 116.034,79 116.334,79.3 129.3,79.3 v2(130.1,80.1)
  Bottom Layer w0.4: U3.2 114.752,73.122 114.752,77.752 v2(116,79) ; v2(130.1,80.1) 130.824,80.824 133.87,80.824 135.198,82.152 136.171,82.152 136.781,81.542 U1.3
BH: U3.14 U7.2 | length 33.9
  Top Layer w0.4: v6(124.9,67.7) 124.204,67.004 124.204,56.625 124.438,56.39 v2(128.014,56.39) 130.848,56.39 131.338,55.9 135.064,55.9 135.564,56.4 v2(135.619,56.4)
  Bottom Layer w0.4: U3.14 v6(124.9,67.7) ; v2(135.619,56.4) 137.306,56.4 138.8,57.894 138.8,58.966 138.566,59.2 137.194,59.2 U7.2
BL: U3.1 U7.3 | length 39
  Top Layer w0.4: v2(114.811,67.289) 114.865,67.289 115.176,67.6 118.522,67.6 119.761,66.361 119.761,62.239 v2(121,61) ; v2(125.1,57.9) 127.106,57.9 127.508,57.497 130.678,57.497 131.176,57 v2(134.4,57)
  Bottom Layer w0.4: U3.1 113.9,72.022 115.4,70.522 115.4,67.932 114.811,67.343 v2(114.811,67.289) ; v2(121,61) 124.1,57.9 v2(125.1,57.9) ; v2(134.4,57) 134.4,58.027 134.2,58.227 134.2,59.2 135,60 135.522,60 135.822,60.3 137.024,60.3 U7.3
BUZZ: U3.9
CH: pad.2@99.605,82.669 U3.15 U4.2 | length 49.1
  Top Layer w0.4: v1(113.2,75.7) 113.2,74.278 116.978,70.5 v1(119,70.5)
  Bottom Layer w0.4: pad.2@99.605,82.669 103.331,82.669 v1(107,79) 110.3,75.7 v1(113.2,75.7) ; v1(119,70.5) 119,70.446 118.4,69.846 118.4,68.702 120.127,66.975 120.795,66.975 U3.15 128.478,66.9 131.126,69.548 133.844,69.548 135.444,71.148 135.776,71.148 136.254,70.67 136.26,70.67 136.494,70.436 136.494,70.272 136.654,70.112 U4.2
CL: U3.32 U4.3 | length 49.6
  Top Layer w0.4: v1(108,76.9) 108,78.6 v1(109.5,80.1) ; v2(124.5,76.5) 126.766,76.5 127,76.266 v2(127,75) ; v2(130.5,70.7) 133.946,70.7 134.246,71 v2(134.3,71)
  Bottom Layer w0.4: v1(108,76.9) 112.53,72.37 U3.32 ; v1(109.5,80.1) 109.5,82 110.502,83.002 118.198,83.002 118.988,82.212 118.988,81.09 123.578,76.5 v2(124.5,76.5) ; v2(127,75) 127.038,74.962 127.038,74.162 v2(130.5,70.7) ; v2(134.3,71) 134.3,71.966 134.534,72.2 135.717,72.2 136.017,71.9 136.966,71.9 136.966,71.542 137.126,71.382 U4.3
CS: C6.1 pad.3@99.605,81.145 R1.2 U3.29 | length 32.8
  Top Layer w0.4: v1(103.961,78.827) 103.961,70.839 106.1,68.7 v2(106.1,67.9)
  Bottom Layer w0.3: R1.2 98.993,77.736 98.053,78.676 98.053,80.343 98.855,81.145 pad.3@99.605,81.145
  Bottom Layer w0.4: pad.3@99.605,81.145 101.855,81.145 103.289,79.711 103.289,79.499 v1(103.961,78.827) ; v2(106.1,67.9) 107.981,67.9 109.381,69.3 U3.29
  Bottom Layer w0.7: C6.1 98.98,74.075 98.98,75.828 R1.2
D6: R20.1 R21.1 R22.1 U3.10 | length 52.9
  Top Layer w0.4: v1(129,69.5) 129,68 v1(130.5,66.5) ; R22.1 129.174,63.261 130.5,61.935 130.5,60.797 129.9,60.197 v2(129.9,59.004)
  Bottom Layer w0.4: R20.1 121.601,54.501 v1(123.4,56.3) 126.8,56.3 128.1,57.6 129.831,57.6 130.977,58.746 ; 121.633,70.9 127.6,70.9 v1(129,69.5) ; v2(129.9,59.004) 129.938,58.966 130.392,58.966 130.612,58.746 130.977,58.746 ; v1(130.5,66.5) 130.5,64.016 130.977,63.539 130.977,58.746
  Bottom Layer w0.5: U3.10 120.895,70.925 121.633,70.925 125.6,74.892 125.6,79.385 R21.1
DTR: C6.2 pad.5 | length 20.9
  Top Layer w0.4: v1(99,62.5) 99,69.818 v1(101.182,72)
  Bottom Layer w0.4: v1(99,62.5) 99.77,61.73 pad.5 ; C6.2 100.318,74.013 101.231,73.1 101.231,72.7 101.22,72.689 101.22,72.038 v1(101.182,72)
GND: 12.1 C2.2 C4.1 C5.1 C10.1 C12.1 C14.1 C15.1 C16.1 C18.1 LED1.2 pad.1@99.651,67.488 pad.1@105.7,54.8 pad.2@99.314,55.118 Q2.3 Q4.3 Q6.3 R3.1 R4.1 R14.1 R15.1 U1.4 U2.4 U3.3 U3.5 U3.21 U4.4 U7.4 X2.2 | length 61.4
  Top Layer w0.5: C4.1 105.338,71.793 105.338,70.462 107.1,68.7 v2(107.1,66.8) ; C5.1 105.555,62.839 107.116,64.4 112.488,64.4 113.279,63.609 113.279,63.079 U2.4 113.405,62.984 115.484,62.984 v2(115.5,63) ; v2(125,58.9) 125,62 126,63 LED1.2 ; v2(128.389,60.211) 128.389,60.238 128.993,60.842 128.993,61.403 R15.1
  Top Layer w0.7: v2(136.8,76.1) 138.2,76.1 138.9,75.4 v2(138.9,72.5)
  Top Layer w1: v2(113.8,78.1) 115.3,78.1 v2(117,76.4) 118.2,77.6 119.457,77.6 C12.1 C16.1 C18.1
  Bottom Layer w0.4: X2.2 112.55,81.2 111.3,79.95 111.3,79.334 111.898,78.736 113.164,78.736 v2(113.8,78.1)
  Bottom Layer w0.5: U3.21 116.3,61 118.304,58.996 12.1
  Bottom Layer w0.7: U4.4 138.748,72.652 v2(138.9,72.5)
  other v2: 107.277,56.423 135.3,60.7 109.7,64.4
MISO: pad.1@99.605,84.193 U3.16 | length 31.7
  Top Layer w0.4: v1(114.1,76.8) 114.1,74.3 115.631,72.769 115.931,72.769 v1(117.5,71.2)
  Bottom Layer w0.4: pad.1@99.605,84.193 103.607,84.193 v1(108,79.8) 111,76.8 v1(114.1,76.8) ; v1(117.5,71.2) 117.532,71.168 117.532,68.6 119.957,66.175 120.795,66.175 U3.16
NetC2_1: C2.1 U3.20 | length 13
  Top Layer w0.5: v1(115,59.1) 117.1,61.2 v1(117.1,61.3)
  Bottom Layer w0.5: C2.1 110.975,54.35 114.443,57.818 114.443,58.516 115,59.073 v1(115,59.1) ; v1(117.1,61.3) U3.20
NetC3_1: C3.1 D1.2 U1.8 | length 16.3
  Bottom Layer w0.7: D1.2 142.825,76.727 142.899,76.802 U1.8 143.429,79.002 146.233,76.198 149.889,76.198 151.927,78.236 151.927,79.872 151.025,80.774 C3.1
NetC4_2: C4.2 U2.8 | length 5.9
  Top Layer w0.3: C4.2 108.564,71.993 108.74,71.818 108.74,69.396 U2.8
NetC8_1: C8.1 U2.1 | length 4.1
  Top Layer w0.7: U2.1 109.579,60.419 109.989,60.009 110.825,60.009 110.925,59.909 C8.1
NetC8_2: C8.2 L3.2 U2.3 | length 11.8
  Top Layer w0.7: U2.3 112.119,60.46 112.175,60.404 112.175,60 C8.2 ; C8.2@112.275,59.905 112.375,60.005 113.205,60.005 114.777,61.577 115.977,61.577 117.86,63.46 117.86,64.81 L3.2
NetC9_1: C9.1 R3.2 | length 2
  Top Layer w0.7: R3.2 C9.1
NetC9_2: C9.2 U2.6 | length 13.4
  Top Layer w0.3: v1(107.8,71.3) 107.8,71.219 108.288,70.731 108.288,67.912 v1(109.4,66.8) 109.9,67.3 111.392,67.3 112.119,68.027 U2.6
  Top Layer w0.5: C9.2 109.831,72.697 109.9,72.627 v1(109.9,72.6)
  Bottom Layer w0.3: v1(107.8,71.3) 108.59,71.3 108.89,71.6 109.724,71.6 109.9,71.776 v1(109.9,72.6)
NetC11_1: C11.1 D3.2 U4.8 | length 12.9
  Bottom Layer w0.7: D3.2 141.725,68.325 142.242,68.842 U4.8 147.903,68.842 150.925,71.864 150.925,72.174 C11.1
NetC13_1: C13.1 D2.2 U7.8 | length 15.9
  Top Layer w0.5: v1(147,56) 148,57 v1(151.2,57)
  Bottom Layer w0.5: U7.8 145.08,57.92 v1(147,56) ; C13.1 151.125,57.075 v1(151.2,57)
  Bottom Layer w0.7: D2.2 141.713,57.391 142.242,57.92 U7.8
NetLED1_1: LED1.1 R25.2 | length 3.6
  Top Layer w0.8: R25.2 125.603,68.947 LED1.1
NetQ1_1: Q1.1 R6.2 | length 22.1
  Top Layer w0.5: Q1.1 132.532,74.167 132.532,76.707 132.824,77 v1(147,77)
  Bottom Layer w0.5: v1(147,77) 149.249,77 150.527,78.278 150.527,78.396 151,78.869 R6.2
NetQ2_1: Q2.1 R7.2 | length 59.3
  Top Layer w0.4: v1(127.2,59.6) 127.2,58.586 127.434,58.352 132.269,58.352 132.554,58.637 Q2.1 ; v1(128.5,77.9) 128.5,71.735 130.5,69.735 v1(130.5,68)
  Bottom Layer w0.4: v1(127.2,59.6) 126.4,60.4 126.4,63.9 v1(130.5,68)
  Bottom Layer w0.6: v1(128.5,77.9) 128.5,79.3 127.785,80.015 127.785,84.334 128.137,84.685 149.156,84.685 150.45,83.391 150.45,83.202 150.748,82.904 150.748,82.854 R7.2
NetQ3_1: Q3.1 R8.2 | length 31
  Top Layer w0.5: v4(139.3,64.4) 139.3,68.633 140.65,69.983 Q3.1
  Bottom Layer w0.5: v4(139.3,64.4) 139.854,63.846 139.854,57.483 140.202,57.135 140.202,55.715 141.293,54.623 150.291,54.623 150.527,54.859 150.527,54.977 151,55.45 R8.2
NetQ4_1: Q4.1 R9.2 | length 26.8
  Top Layer w0.7: v5(140.606,58) 140.621,58.015 140.621,58.231 140.651,58.261 Q4.1@140.861,58.261 ; Q4.1 140.756,59.846 140.891,59.981 141.881,59.981 143.7,61.8 154.29,61.8 154.7,61.39 v1(154.7,57.1)
  Bottom Layer w0.7: R9.2 151.1,62.071 154.7,58.471 v1(154.7,57.1)
NetQ5_1: Q5.1 R10.2 | length 8.3
  Top Layer w0.5: Q5.1 148.92,73.17 151.081,71.009 151.081,70.219 v2(151.1,70.2)
  Bottom Layer w0.5: R10.2 150.975,70.048 151.1,70.173 v2(151.1,70.2)
NetQ6_1: Q6.1 R11.2 | length 27.2
  Top Layer w0.5: v4(147,63) v4(147,64.7) ; v3(147.1,60.8) 147.403,60.497 148.628,60.497 148.863,60.262 Q6.1
  Bottom Layer w0.5: v4(147,63) 147,60.9 v3(147.1,60.8) ; v4(147,64.7) 154.7,64.7 155,65 v1(155,70.5) 155,72.8 153.637,74.163 R11.2
NetR2_1: R2.1 U2.7 | length 8
  Top Layer w0.7: U2.7 110.849,75.914 110.975,76.04 110.975,76.375 111.05,76.45 R2.1
NetR4_2: R4.2 R5.1 U2.5 | length 19.8
  Top Layer w0.3: v1(106.6,70.3) 107.836,69.064 107.836,67.513 109.151,66.198 109.72,66.198 110.022,66.5 v1(110.9,66.5) 111.862,66.5 113.389,68.027 U2.5
  Top Layer w0.7: R5.1 106.446,77.569 106.446,75.83 R4.2 106.463,75.763 106.538,75.688 107.512,75.688 v1(107.8,75.4)
  Bottom Layer w0.5: v1(106.6,70.3) 106.6,74.5 107.481,75.381 107.781,75.381 v1(107.8,75.4)
NetR6_1: R6.1 U1.7 | length 7.4
  Bottom Layer w0.7: U1.7 148.347,80.272 R6.1
NetR7_1: R7.1 U1.5 | length 6.7
  Bottom Layer w0.7: U1.5 149.498,82.812 149.573,82.737 R7.1
NetR8_1: R8.1 U7.7 | length 8.5
  Bottom Layer w0.7: U7.7 146.06,59.19 149.7,55.55 R8.1
NetR9_1: R9.1 U7.5 | length 10.4
  Bottom Layer w0.5: U7.5 142.772,63.472 143.2,63.9 149.2,63.9 149.8,63.3 R9.1
NetR10_1: R10.1 U4.7 | length 15.1
  Bottom Layer w0.5: U4.7 142.242,70.112 140.973,68.843 140.973,65.956 141.929,65 146.1,65 v1(147,65.9) ; v1@147.027,65.9 148.825,65.9 149.675,66.75 R10.1
NetR11_1: R11.1 U4.5 | length 7.6
  Bottom Layer w0.7: U4.5 143.302,72.652 143.312,72.662 144.276,72.662 145.062,73.448 146.504,73.448 147.219,74.163 R11.1
"PHASE A": C3.2 Q1.3 Q2.4 R17.2 U1.6 | length 15.9
  Bottom Layer w0.5: v3(137.5,75.327) 141.607,79.434 141.607,80.693 141.948,81.034 141.966,81.034 142.259,81.327 142.259,81.432 142.369,81.542 U1.6
  Bottom Layer w0.7: U1.6 149.007,81.542 149.675,80.874 C3.2
"PHASE B": C13.2 Q3.3 Q4.4 R16.2 U7.6 | length 37.7
  Bottom Layer w0.7: R16.2 124.398,82.253 124.398,82.064 124.808,81.654 124.941,81.654 126.352,80.243 126.352,78.148 130.8,73.7 143.4,73.7 v2(144.8,75.1) ; v5(140.9,63.7) 140.9,61.748 141.78,60.868 141.834,60.868 142.252,60.45 143.312,60.45 143.71,60.052 146.403,60.052 146.555,59.9 149.265,59.9 149.304,59.939 149.675,59.939 149.775,60.039 C13.2
"PHASE C": C11.2 Q5.3 Q6.4 R13.2 U4.6 | length 58.7
  Top Layer w0.4: v3(130.4,63.3) 131.7,62 137.293,62 138.5,63.207 v3(138.5,64.4) 138.5,68.685 139,69.185 v2(139,71.5)
  Top Layer w0.5: v2(147.1,72.2) 147.1,74.677 148.34,75.917 150.476,75.917 151.25,75.144 153.265,75.144 153.5,74.909 Q5.3
  Bottom Layer w0.4: R13.2 119.252,57.1 126.6,57.1 130.41,60.91 130.41,63.29 v3(130.4,63.3)
  Bottom Layer w0.5: v2(147.1,72.2) 147.127,72.2 147.201,72.274 C11.2
  Bottom Layer w0.7: v2(139,71.5) 139.118,71.382 U4.6 143.302,71.382 143.584,71.1 148.551,71.1 149.575,72.124 149.575,72.174 C11.2
PWM_IN: pad.3@99.651,64.44 U3.12 | length 27
  Top Layer w0.4: v1(102.7,61.5) 103.947,62.747 103.947,63.529 105.155,64.737 106.602,64.737 107.561,65.696 109.928,65.696 110.032,65.8 112.4,65.8 116,69.4 v1(119.2,69.4)
  Bottom Layer w0.4: pad.3@99.651,64.44 99.651,63.049 101.2,61.5 v1(102.7,61.5) ; v1(119.2,69.4) 119.254,69.4 119.354,69.3 U3.12
RX: pad.3@102.743,54.779 U3.30 | length 25.7
  Top Layer w0.4: v1(102.8,59) 101.196,60.604 101.196,67.296 102.5,68.6 v1(104.2,68.6)
  Bottom Layer w0.4: pad.3@102.743,54.779 102.771,54.807 102.771,58.971 v1(102.8,59) ; v1(104.2,68.6) 107.9,68.6 109.4,70.1 U3.30
SCK: pad.4@99.605,79.621 U3.17 | length 34.4
  Top Layer w0.4: v1(110.6,65.102) 113.752,65.102 115.45,66.8 v1(118.4,66.8)
  Bottom Layer w0.4: pad.4@99.605,79.621 102.179,79.621 103.348,78.452 103.348,69.13 103.4,69.078 v1(103.4,67.7) 105.1,67.7 107.698,65.102 v1(110.6,65.102) ; v1(118.4,66.8) 118.454,66.8 118.825,66.429 ; 118.827,66.428 119.369,65.982 119.5,65.851 U3.17
TX: pad.4@101.211,54.798 U3.31 | length 27.2
  Top Layer w0.4: v1(101.3,59) 100.6,59.7 100.6,69 101,69.4 v1(104,69.4)
  Bottom Layer w0.4: pad.4@101.211,54.798 101.211,58.857 101.3,58.946 v1(101.3,59) ; v1(104,69.4) 107.4,69.4 108.9,70.9 U3.31
VCC: C12.2 C16.2 C18.2 L3.1 pad.2@99.651,65.964 pad.2@104.2,54.8 R1.1 R5.2 R25.1 U3.4 U3.6 U3.18 | length 96.8
  Top Layer w0.7: v2(101.5,77.5) 103.629,79.629 104.293,79.629 105.129,78.793 R5.2
  Top Layer w1: v2(111.6,57.8) 112.854,57.8 113.108,57.546 120.151,57.546 123.049,60.444 123.049,61.233 120.982,63.3 v2(120.9,63.3) 120.9,63.45 122.484,65.034 122.515,65.034 122.515,72.355 C18.2 C16.2 ; C12.2 C16.2 ; R25.1 125.553,73.294 125.378,73.469 125.378,73.519 123.846,75.051 C16.2
  Bottom Layer w0.4: U3.4 116.3,67.8 118.625,65.475 118.625,64.805 118.775,64.655 118.775,63.988 119.463,63.3 v2(120.9,63.3) ; 116.375,72.327 116.72,71.983 117.481,71.983 117.727,72.229 ; 117.9,72.229 U3.6
  Bottom Layer w0.8: 104.2,53.484 104.786,52.898 106.47,52.898 108.523,54.951 108.523,56.023 110.284,57.784 v2@111.584,57.784
  Bottom Layer w1: pad.2@99.651,65.964 100.694,65.964 100.696,65.966 103.464,65.966 103.482,65.984 ; R1.1@100.275,75.775 100.835,75.215 101.038,75.215 102.134,74.119 102.134,67.332 103.482,65.984 ; R1.1@100.275,75.875 100.275,76.275 v2(101.5,77.5) ; 104.2,53.484 pad.2@104.2,54.766 ; pad.2@104.2,54.818 104.2,55.843 104.182,55.861 104.182,65.284 103.482,65.984
X1: R23.2 U3.8 X2.3 | length 13.8
  Bottom Layer w0.5: X2.3 116.4,82.4 117.05,81.75 R23.2 117.15,81.75 117.623,81.277 117.741,81.277 119.5,79.518 U3.8
X2: R23.1 U3.7 X2.1 | length 12.1
  Bottom Layer w0.5: X2.1 116.6,80 117.05,80.45 R23.1 117.15,80.45 118.7,78.9 U3.7
pads on no net: U3.11

## Polygon pours and split planes (outlines as drawn)
+12 on Top Layer "+12_L01_P042" (solid, pour order 42): 97.5,86.5 155.5,86.5 155.5,52 97.5,52
"PHASE B" on Top Layer "PHASE_B_L01_P008" (solid, pour order 8): 144.5,75.5 144.5,69.5 141.9,69.5 141.9,65.8 146.2,65.8 146.2,75.5
+12 on Top Layer "+12_L01_P001" (solid, pour order 1): 98.298,83.693 98.298,80.772 134.239,80.772 134.239,83.566 134.112,83.693
GND on Top Layer "GND_L01_P005" (solid, pour order 5): 98.3,55.5 98.3,53.025 153.991,53.025 154.008,53.008 154.008,61.008 152.908,61.008 152.908,55.5 146.008,55.5 146.008,60.808 144.708,60.808 144.708,55.5 137.708,55.5 137.708,60.808 136.508,60.808 136.508,55.5
GND on Top Layer "GND_L01_P028" (solid, pour order 28): 134.1,60.8 134.1,57.6 137.2,57.6 137.3,57.7 137.3,60.8
GND on Top Layer "GND_L01_P022" (solid, pour order 22): 98.3,57.1 108,57.1 108,55.4 107.9,55.5 98.3,55.5
A2 on Top Layer "A2_L01_P017" (solid, pour order 17): 127.4,65.6 127.4,61 128.4,61 128.4,65.6
"PHASE A" on Top Layer "PHASE_A_L01_P016" (solid, pour order 16): 136.6,64.6 136.6,65.6 128.7,65.6 128.7,64.6
GND on Top Layer "GND_L01_P012" (solid, pour order 12): 104.7,76.3 104.7,71.5 105.6,71.5 105.6,76.3
"PHASE C" on Top Layer "PHASE_C_L01_P011" (solid, pour order 11): 152.8,75.55 152.8,69.55 150.2,69.55 150.2,65.85 154.5,65.85 154.5,75.55
"PHASE A" on Top Layer "PHASE_A_L01_P007" (solid, pour order 7): 136,75.5 136,69.5 133.4,69.5 133.4,65.8 137.7,65.8 137.7,75.5
+12 on Top Layer "+12_L01_P003" (solid, pour order 3): 134.239,83.566 153.924,83.566 153.924,80.772 134.239,80.772
no net on Top Solder "PHASE_B_L01_P008" (solid): 144.523,75.49 144.523,69.49 141.923,69.49 141.923,65.79 146.223,65.79 146.223,75.49
"PHASE C" on Top Solder "PHASE_C_L01_P009" (solid, pour order 9): 152.8,75.55 152.8,69.55 150.2,69.55 150.2,65.85 154.5,65.85 154.5,75.55
"PHASE A" on Top Solder "PHASE_A_L01_P006" (solid, pour order 6): 136,75.5 136,69.5 133.4,69.5 133.4,65.8 137.7,65.8 137.7,75.5
GND on Top Solder "GND_L01_P004" (solid, pour order 4): 98.2,55.5 98.2,53.017 153.983,53.017 154,53 154,61 152.9,61 152.9,55.5 146,55.5 146,60.8 144.7,60.8 144.7,55.5 137.7,55.5 137.7,60.8 136.5,60.8 136.5,55.5
+12 on Top Solder "+12_L01_P002" (solid, pour order 2): 134.239,83.566 153.924,83.566 153.924,80.772 134.239,80.772
+12 on Top Solder "+12_L01_P000" (solid, pour order 0): 98.298,83.693 98.298,80.772 134.239,80.772 134.239,83.566 134.112,83.693
GND on Bottom Layer "GND_L02_P043" (solid, pour order 43): 97.5,86.5 155.5,86.5 155.5,52 97.5,52
A1 on Bottom Layer "A1_L02_P015" (solid, pour order 15): 122.6,84.4 122.6,80.2 123.4,80.2 123.4,84.4
A0 on Bottom Layer "A0_L02_P014" (solid, pour order 14): 116.6,58.2 116.6,54.1 117.4,54.1 117.4,58.2

## Keep-outs
Keep-Out Layer:
  lines w0.05: 97.5,52 154.5,52 155.5,52 155.5,86.5 97.5,86.5 97.5,52

## Other copper
Top Layer:
  region net +12: 98.784,71.366 98.786,71.641 98.789,71.644 98.792,71.646 98.801,71.652 98.803,71.654 98.806,71.656 98.815,71.662 98.818,71.664 98.825,71.668 98.834,71.675 98.849,71.684 98.851,71.686 98.855,71.69 98.862,71.694 98.871,71.699 98.874,71.702 98.877,71.703 98.886,71.71 98.893,71.714 98.902,71.72 98.911,71.726 98.925,71.735 98.927,71.736 98.936,71.743 98.939,71.744 98.948,71.751 98.951,71.752 98.964,71.761 98.971,71.765 98.988,71.777 98.999,71.784 99.014,71.793 99.016,71.795 99.02,71.799 99.027,71.803 99.03,71.805 99.039,71.811 99.048,71.817 99.051,71.819 99.06,71.825 99.063,71.827 99.065,71.829 99.075,71.835 99.091,71.845 99.095,71.844 99.097,71.837 99.095,71.142 99.092,71.138 99.089,71.136 99.076,71.127 99.073,71.126 99.071,71.123 99.064,71.119 99.052,71.111 99.044,71.106 99.031,71.097 99.028,71.095 99.019,71.089 99.016,71.087 99.014,71.085 99.007,71.081 98.994,71.072 98.984,71.065 98.979,71.062 98.964,71.053 98.962,71.051 98.959,71.049 98.956,71.047 98.947,71.041 98.938,71.035 98.925,71.026 98.922,71.025 98.913,71.018 98.91,71.017 98.901,71.01 98.898,71.009 98.885,71 98.877,70.995 98.87,70.99 98.857,70.982 98.849,70.976 98.842,70.972 98.829,70.962 98.826,70.961 98.823,70.958 98.821,70.957 98.804,70.946 98.797,70.941 98.794,70.938 98.789,70.937 98.786,70.938 98.784,70.94 98.784,71.365
  region net +12: 343 vertices and 0 holes, not listed, extent 97.876,70.934 99.097,72.703
  region net +12: 98.117,73.073 98.125,73.07 98.139,73.065 98.144,73.063 98.153,73.059 98.195,73.044 98.206,73.04 98.212,73.038 98.242,73.027 98.248,73.024 98.254,73.023 98.261,73.02 98.27,73.017 98.282,73.012 98.289,73.01 98.301,73.005 98.318,72.998 98.323,72.997 98.333,72.993 98.341,72.99 98.349,72.986 98.353,72.984 98.355,72.979 98.353,72.974 98.355,72.968 98.354,72.69 98.355,72.685 98.351,72.68 98.348,72.68 98.341,72.681 98.33,72.686 98.325,72.687 98.313,72.692 98.305,72.694 98.294,72.699 98.289,72.7 98.28,72.704 98.274,72.706 98.262,72.711 98.255,72.713 98.248,72.716 98.242,72.718 98.229,72.723 98.224,72.724 98.212,72.73 98.204,72.732 98.193,72.736 98.186,72.738 98.178,72.742 98.171,72.744 98.16,72.748 98.153,72.75 98.141,72.755 98.136,72.756 98.129,72.759 98.087,72.774 98.05,72.788 98.035,72.793 98.03,72.795 98.017,72.799 98.011,72.801 97.994,72.808 97.986,72.81 97.979,72.813 97.974,72.815 97.962,72.82 97.954,72.822 97.947,72.825 97.942,72.827 97.924,72.833 97.919,72.835 97.907,72.84 97.9,72.842 97.898,72.844 97.889,72.846 97.883,72.849 97.876,72.854 97.877,73.161 97.879,73.163 97.883,73.162 97.886,73.159 97.895,73.157 97.906,73.153 97.916,73.149 97.923,73.146 97.93,73.144 97.942,73.139 97.959,73.133 97.972,73.127 97.978,73.126 97.99,73.121 97.997,73.119 98.003,73.115 98.008,73.114 98.026,73.107 98.031,73.106 98.043,73.101 98.048,73.099 98.057,73.095 98.075,73.089 98.08,73.087 98.089,73.083 98.107,73.077 98.116,73.074
  region net +12: 421 vertices and 5 holes, not listed, extent 97.798,73.308 99.505,75.015

## Silkscreen, mask and mechanical layers (free items; w line width, h text height)
Top Overlay:
  circle w0.032: c98.667,74.175 r0.86
  text "+" at 100.818,76.7 h5 r90
  text "Electrical Speed Controller Board" at 100.878,75.1 h1 r270
  text "PCB Design by AE" at 99.888,75 h1 r270
  text "lectronics" at 97.9,70.7 h0.89 r270
  text "-" at 100.104,59.482 h7 r180
Bottom Overlay:
  lines w0.2: 98.3,63.6 98,63.6 98,68.3 98.4,68.3 ; 98.4,78.8 98,78.8 98,85 98.4,85 ; 98.9,53.7 98.9,53.2 106.5,53.2 106.5,53.7
  text "MISO" at 103.322,83.95 h1
  text "MOSI" at 103.322,82.426 h1
  text "RST" at 103.3,80.811 h1
  text "SCK" at 103.322,79.251 h1
  text "GND" at 103,67.211 h1
  text "VCC" at 102.942,65.612 h1
  text "PWM" at 103.2,64.1 h1
  text "GND" at 106.042,58.307 h1 r90
  text "VCC" at 104.603,58.262 h1 r90
  text "DTR" at 100.047,58.099 h1 r90
  text "TX" at 101.544,57.519 h1 r90
  text "RX" at 103.13,57.532 h1 r90
Top Solder:
  drawing of 4 lines, arcs and shapes, not listed